# Altium PCB PCB1.PcbDoc
Units mil, origin at the board's own origin, x right, y up, seen from the top; angles counter-clockwise.
Board outline 6000 x 4000 mil, 2 copper layers (Top Layer, Bottom Layer); 164 components, 109 nets, 675 pads, 2 vias.
Unrouted connection lines stored in the file: 443.
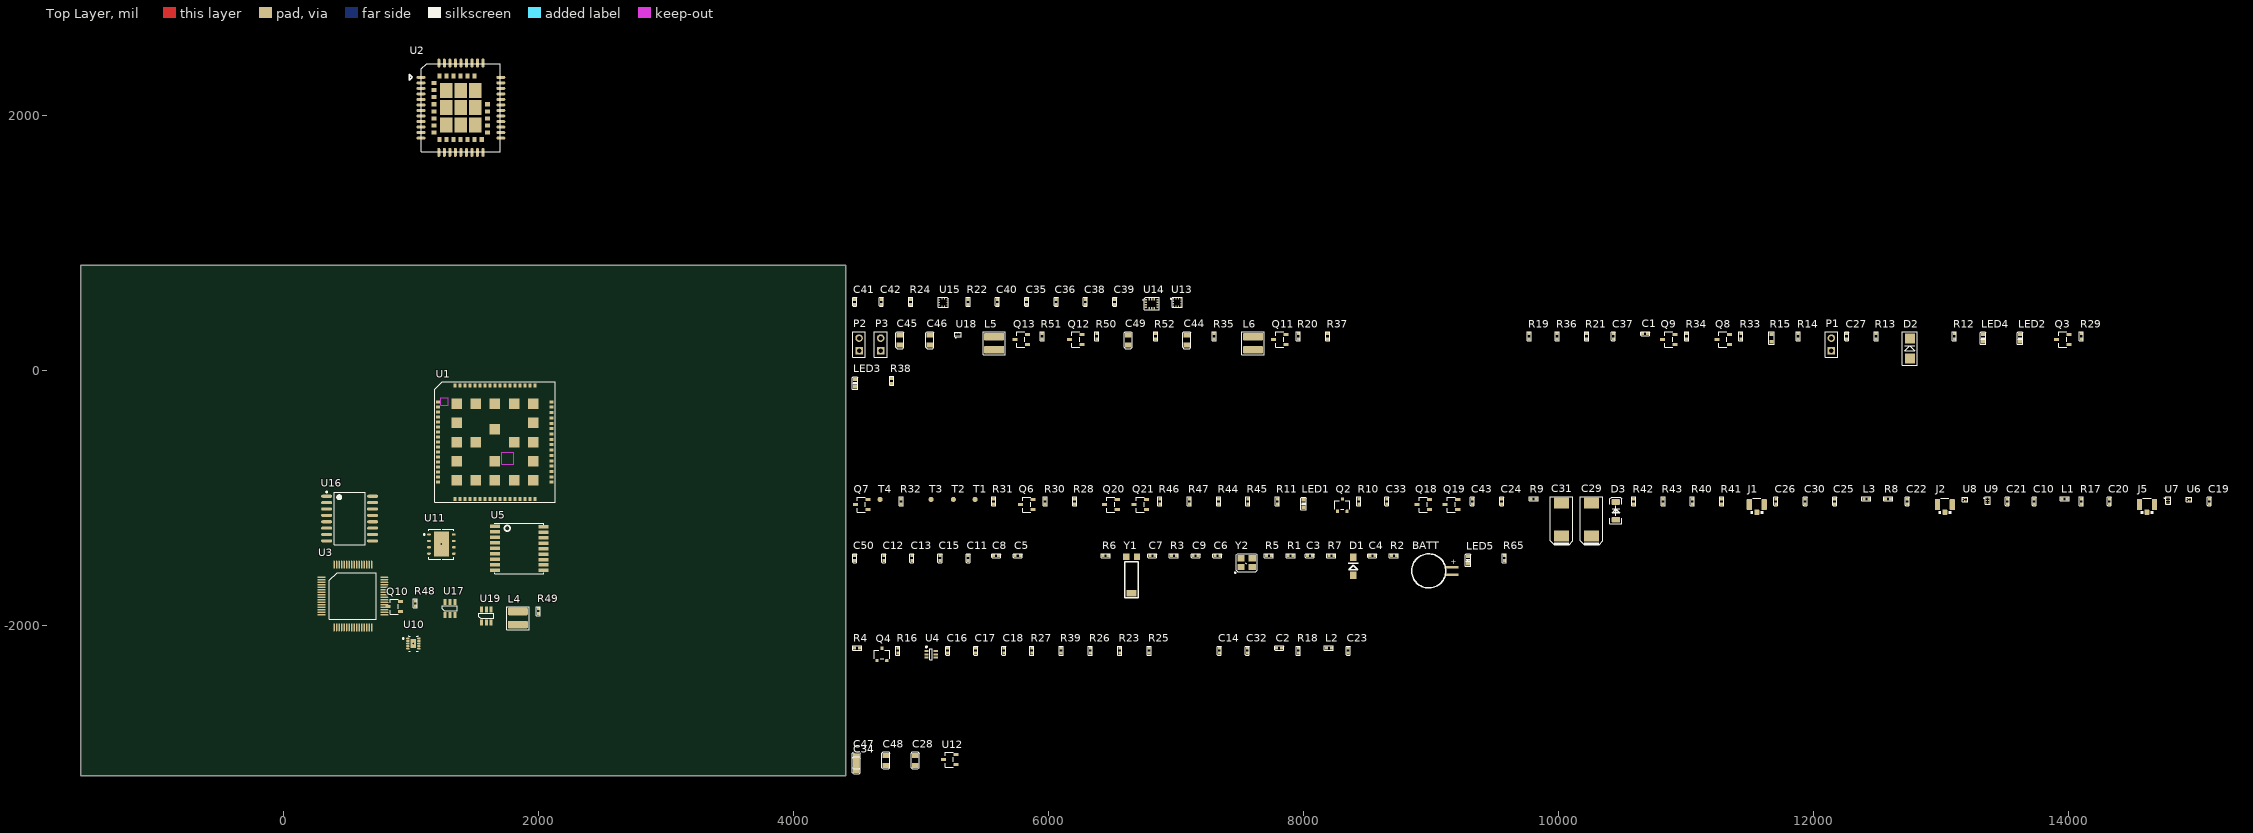
[diagram p0: Top Layer view]
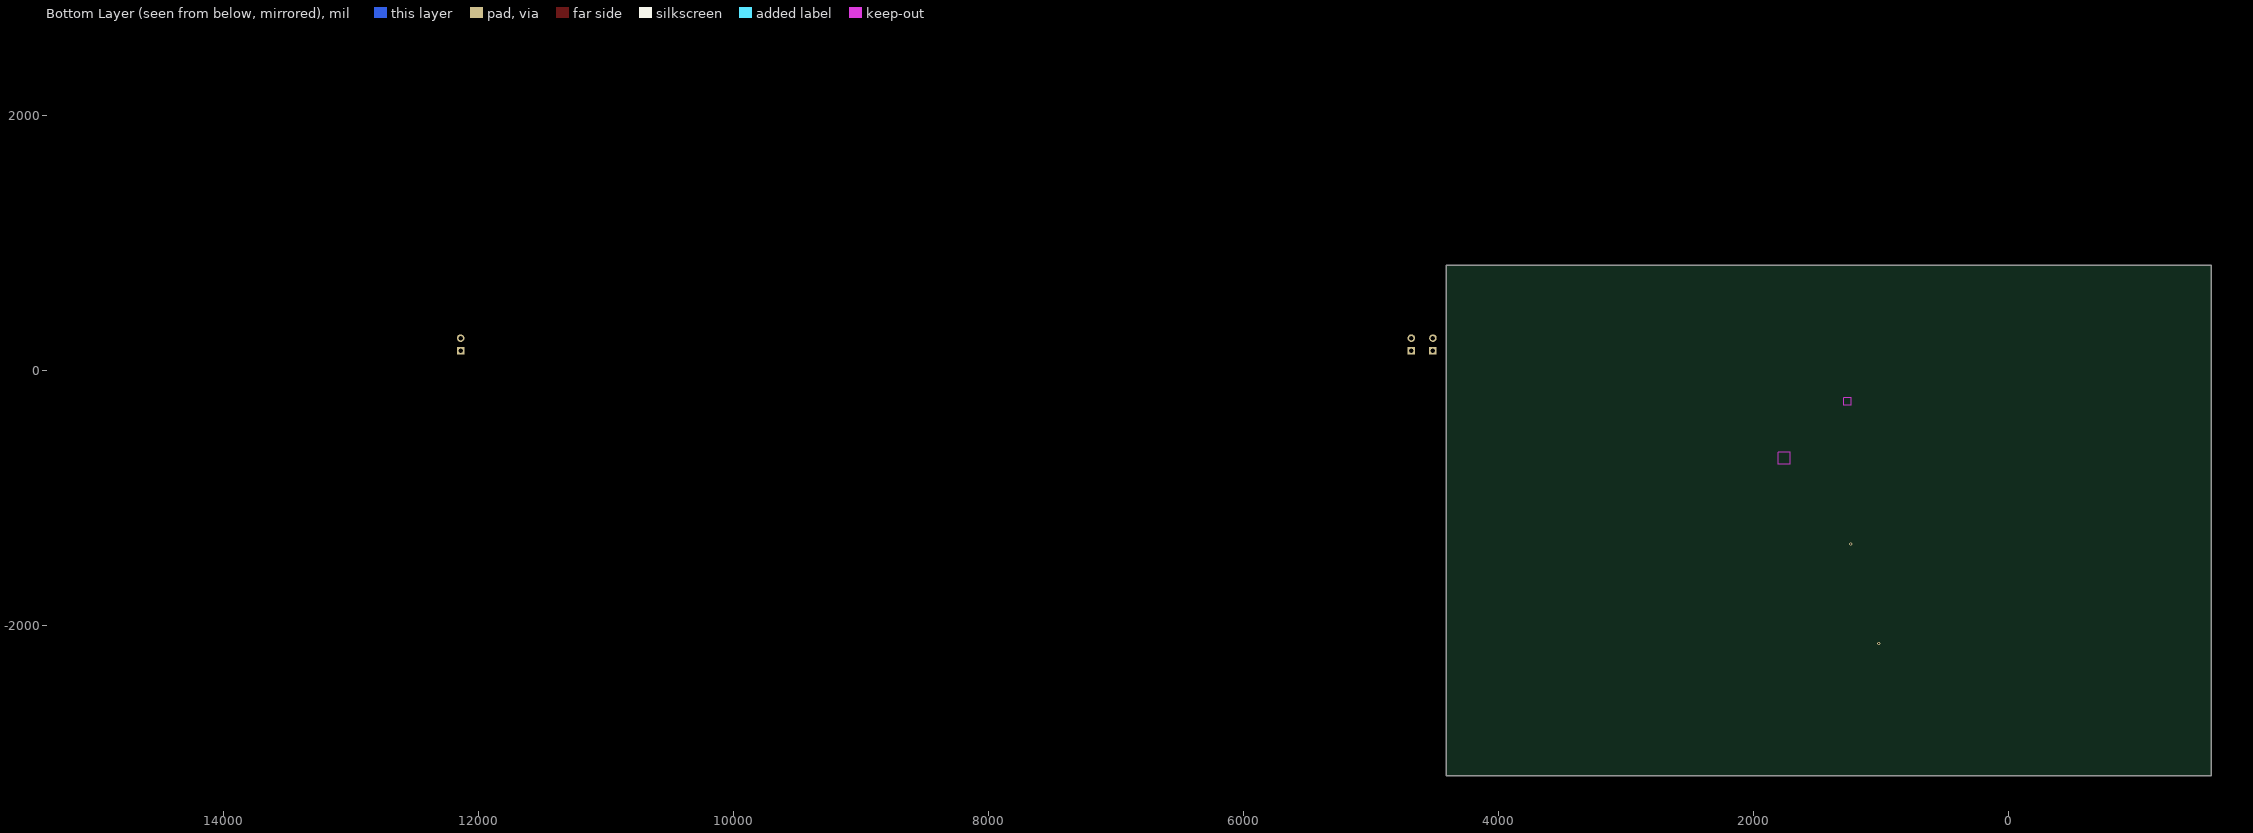
[diagram p1: Bottom Layer view, seen from below]

## Layer stack, top to bottom
Top Layer: signal copper 1.4
Dielectric: dielectric 12.6, FR-4, Dk 4.8
Bottom Layer: signal copper 1.4

## Board outline
-1590,-3175 4410,-3175 4410,825 -1590,825

## Design rules (kind name [scope] priority, off if disabled: settings)
Clearance [All] p1: gap=10
PolygonConnect [All] p1: connectstyle=Relief reliefconductorwidth=10 reliefentries=4 polygonreliefangle="90 Angle"
RoutingVias [All] p1: holewidth=28 width=50 viastyle="Through Hole" minholewidth=28 minwidth=50 maxholewidth=28 maxwidth=50
SilkscreenOverComponentPads [All] p1: minsilkscreentomaskgap=10
SolderMaskExpansion [All] p1: expansion=4
Width [All] p1: maxlimit=10 minlimit=10 preferedwidth=10
27 further rules are at their usual default settings.

## Classes and differential pairs
component class sensors: C35 C36 C38 C39 C40 C41 C42 R22 R24 U13 U14 U15
component class power: C1 C27 C28 C34 C37 C44 C45 C46 C47 C48 C49 D2 L4 L5 L6 LED2 LED4 P1 P2 P3 Q3 Q8 Q9 Q10 Q11 Q12 Q13 R12 R13 R14 R15 R19 R20 R21 R29 R33 R34 R35 R36 R37 R48 R49 R50 R51 R52 U10 U12 U17 U18 U19
component class GPS&&lte: C10 C19 C20 C21 C22 C24 C25 C26 C29 C30 C31 C33 C43 D3 J1 J2 J5 L1 L3 LED1 Q2 Q6 Q7 Q18 Q19 Q20 Q21 R8 R9 R10 R11 R17 R28 R30 R31 R32 R40 R41 R42 R43 R44 R45 R46 R47 T1 T2 T3 T4 U6 U7 U8 U9
component class NBIOT: LED3 R38 SIM1 U2
component class CPU: BATT C3 C4 C5 C6 C7 C8 C9 C11 C12 C13 C15 C50 D1 LED5 R1 R2 R3 R5 R6 R7 R65 U3 U16 U? Y1 Y2
component class 4G: C2 C14 C16 C17 C18 C23 C32 L2 Q4 R4 R16 R18 R23 R25 R26 R27 R39 U1 U4 U5 U11 U?

## Components (designator, comment, footprint, x,y, rotation, side; value= is the part's Value field where it differs from the comment)
BATT "MS621FE" MS621FE 9165,-1570 r0 top
C1 "0.1uF/25V" 0402c 10660,290 r0 top
C2 "4.7uF/10V" 0402c 7790,-2175 r0 top
C3 "0.1uF/25v" 0402c 8030,-1450 r0 top
C4 "22pF" 0402c 8520,-1450 r0 top
C5 "6pF" 0402c 5740,-1450 r0 top
C6 "22pF" 0402c 7305,-1450 r0 top
C7 "6pF" 0402c 6795,-1450 r0 top
C8 "0.1uF/25V" 0402C 5570,-1450 r0 top
C9 "0.1uF/25V" 0402C 7135,-1450 r0 top
C10 "NC" 0402c 13730,-1045 r90 top
C11 "0.1uF/25V" 0402C 5370,-1490 r90 top
C12 "0.1uF/25V" 0402C 4710,-1490 r90 top
C13 "0.1uF/25V" 0402C 4930,-1490 r90 top
C14 "0.1uF" 0402C 7340,-2215 r90 top
C15 "0.1uF/25V" 0402C 5150,-1490 r90 top
C16 "10pF/NC" 0402C 5210,-2215 r90 top
C17 "10pF/NC" 0402C 5430,-2215 r90 top
C18 "10pF/NC" 0402C 5650,-2215 r90 top
C19 "0.1uF" 0402C 15105,-1045 r90 top
C20 "36pF" 0402c 14320,-1045 r90 top
C21 "NC" 0402c 13520,-1045 r90 top
C22 "36pF" 0402c 12735,-1045 r90 top
C23 "4.7uF" 0402c 8350,-2215 r90 top
C24 "10pF" 0402C 9555,-1045 r90 top
C25 "0.1uF" 0402C 12165,-1045 r90 top
C26 "NC" 0402c 11705,-1045 r90 top
C27 "1uF/25V" 0402C 12260,250 r90 top
C28 "22uF/10V" 0805C 4955,-3095 r90 top
C29 "1000uF" 7343 10260,-1295 r90 top
C30 "NC" 0402c 11935,-1045 r90 top
C31 "1000uF" 7343 10025,-1295 r90 top
C32 "10uF/10V" 0402C 7560,-2215 r90 top
C33 "0.1uF" 0402C 8655,-1045 r90 top
C34 "22uF/10V" 0805C 4495,-3135 r90 top
C35 "0.1uF/25V" 0402C 5830,520 r90 top
C36 "0.1uF/25V" 0402C 6060,520 r90 top
C37 "0.1uF/25V" 0402c 10430,250 r90 top
C38 "0.1uF/25V" 0402C 6290,520 r90 top
C39 "0.1uF/25V" 0402C 6520,520 r90 top
C40 "22pF" 0402c 5600,520 r90 top
C41 "0.1uF/25V" 0402C 4480,520 r90 top
C42 "0.1uF/25V" 0402C 4690,520 r90 top
C43 "33pF" 0402C 9325,-1045 r90 top
C44 "22uF/10V" 0805C 7085,200 r90 top
C45 "22uF/10V" 0805C 4835,200 r90 top
C46 "22uF/10V" 0805C 5070,200 r90 top
C47 "22uF/10V" 0805C 4495,-3095 r90 top
C48 "22uF/10V" 0805C 4725,-3095 r90 top
C49 "22uF/10V" 0805C 6625,200 r90 top
C50 "0.1uF/25V" 0402C 4480,-1490 r90 top
D1 "1N4148" DIODE_SOP 8390,-1605 r90 top
D2 "SMAJ12CA" SMA 12755,95 r90 top
D3 "DIODE_SCHOTTKY_0" LL-34(D1206) 10450,-1100 r90 top
J1 "IPEX" RF-UFL 11555,-1050 r0 top
J2 "IPEX" RF-UFL 13030,-1050 r0 top
J5 "IPEX" RF-UFL 14615,-1050 r0 top
L1 "LQW15A" 0402R 13950,-1005 r0 top
L2 "27nH" 0402R 8180,-2175 r0 top
L3 "LQW15A" 0402R 12395,-1005 r0 top
L4 "SRP4020TA-1R0M" CD_4*4 1840,-1940 r0 top
L5 "SRP4020TA-2R2M" CD_4*4 5575,215 r0 top
L6 "SRP4020TA-1R0M" CD_4*4 7605,215 r0 top
LED1 "LED" 0603LED 8000,-1070 r90 top
LED2 "LED" 0603LED 13620,225 r90 top
LED3 "LED" 0603LED 4485,-125 r90 top
LED4 "LED" 0603LED 13330,225 r90 top
LED5 "LED" 0603LED 9290,-1515 r90 top
P1 "Header 2" HDR1X2 12140,155 r90 top
P2 "Header 2" HDR1X2 4515,155 r90 top
P3 "Header 2" HDR1X2 4685,155 r90 top
Q2 "S8050" SOT23 8305,-1055 r0 top
Q3 "Si2369DS" sot23-3 14005,205 r0 top
Q4 "S8050" SOT23 4695,-2225 r0 top
Q6 "MMBT3904" SOT23-3 5880,-1090 r0 top
Q7 "MMBT3904" SOT23-3 4585,-1090 r0 top
Q8 "Si2369DS" sot23-3 11340,205 r0 top
Q9 "S8050" SOT23-3 10915,205 r0 top
Q10 "Si2369DS" sot23-3 920,-1890 r0 top
Q11 "S8050" SOT23-3 7865,205 r0 top
Q12 "Si2369DS" sot23-3 6265,205 r0 top
Q13 "S8050" SOT23-3 5835,205 r0 top
Q18 "MMBT3904" SOT23-3 8990,-1090 r0 top
Q19 "MMBT3904" SOT23-3 9210,-1090 r0 top
Q20 "MMBT3904" SOT23-3 6540,-1090 r0 top
Q21 "MMBT3904" SOT23-3 6770,-1090 r0 top
R1 "1MR" 0402R 7880,-1450 r0 top
R2 "10K/1%" 0402R 8690,-1450 r0 top
R3 "100K" 0402R 6965,-1450 r0 top
R4 "47K" 0402R 4480,-2175 r0 top
R5 "10K/1%" 0402R 7710,-1450 r0 top
R6 "10K" 0402R 6430,-1450 r0 top
R7 "470" 0402R 8200,-1450 r0 top
R8 "0" 0402R 12565,-1005 r0 top
R9 "1K" 0402R 9785,-1005 r0 top
R10 "4.7K" 0402R 8435,-1045 r90 top
R11 "47K" 0402R 7795,-1045 r90 top
R12 "1K/1%" 0402R 13105,250 r90 top
R13 "3.95K/1%" 0402R 12490,250 r90 top
R14 "21.5k/1%" 0402R 11880,250 r90 top
R15 "RTH103AT" 0603R 11670,225 r90 top
R16 "4.7K" 0402R 4820,-2215 r90 top
R17 "0" 0402R 14100,-1045 r90 top
R18 "10K" 0402R 7960,-2215 r90 top
R19 "400K/1%" 0402R 9770,250 r90 top
R20 "100K/1%" 0402R 7960,250 r90 top
R21 "400K/1%" 0402R 10220,250 r90 top
R22 "4.7K" 0402R 5370,520 r90 top
R23 "10R" 0402R 6560,-2215 r90 top
R24 "4.7K" 0402R 4920,520 r90 top
R25 "0R" 0402R 6790,-2215 r90 top
R26 "0R" 0402R 6330,-2215 r90 top
R27 "10R" 0402R 5870,-2215 r90 top
R28 "4.7K" 0402R 6205,-1045 r90 top
R29 "1K/1%" 0402R 14100,250 r90 top
R30 "10K" 0402R 5975,-1045 r90 top
R31 "4.7K" 0402R 5570,-1045 r90 top
R32 "4.7K" 0402R 4845,-1045 r90 top
R33 "4K7" 0402R 11430,250 r90 top
R34 "4K7" 0402R 11005,250 r90 top
R35 "10K/1%" 0402R 7300,250 r90 top
R36 "4K7" 0402R 9990,250 r90 top
R37 "4K7" 0402R 8190,250 r90 top
R38 "1K" 0402R 4770,-100 r90 top
R39 "10R" 0402R 6100,-2215 r90 top
R40 "4.7K" 0402R 11050,-1045 r90 top
R41 "4.7K" 0402R 11280,-1045 r90 top
R42 "10K" 0402R 10590,-1045 r90 top
R43 "10K" 0402R 10820,-1045 r90 top
R44 "4.7K" 0402R 7335,-1045 r90 top
R45 "4.7K" 0402R 7565,-1045 r90 top
R46 "4.7K" 0402R 6875,-1045 r90 top
R47 "4.7K" 0402R 7105,-1045 r90 top
R48 "100K/1%" 0402R 1035,-1845 r90 top
R49 "54K/1%" 0402R 2000,-1905 r90 top
R50 "4K7" 0402R 6380,250 r90 top
R51 "4K7" 0402R 5950,250 r90 top
R52 "10K/1%" 0402R 6840,250 r90 top
R65 "1K" 0402R 9575,-1490 r90 top
T1 "TPD" TPD 5425,-1010 r0 top
T2 "TPD" TPD 5255,-1010 r0 top
T3 "TPD" TPD 5080,-1010 r0 top
T4 "TPD" TPD 4680,-1010 r0 top
U1 "A7670" A7670 1660,-560 r0 top
U2 "SIM7080G" SIM868 1080,2300 r0 top
U3 "stm32l412r8t6" LQFP-64 300,-1620 r0 top
U4 "SMF05C_1" SC70-6L 5080,-2225 r0 top
U5 "SIM868E/SIM68" SIM68MB 1660,-1220 r0 top
U6 "SAFFB1G56KB0F0A" SAFFB1G56KB0F0A 14925,-1010 r0 top
U7 "AW5005DNR" AW5005 14780,-1020 r0 top
U8 "SAFFB1G56KB0F0A" SAFFB1G56KB0F0A 13170,-1010 r0 top
U9 "AW5005DNR" AW5005 13365,-1020 r0 top
U10 "bq24210" QFN50P200X300X80-10N 1020,-2140 r0 top
U11 "SLI76CF3600P" QFN127P500X600X80-8N 1240,-1360 r0 top
U12 "REF3025AIDBZR" SOT23-3 5275,-3090 r0 top
U13 "LIS2MDL" LIS2MDL 7010,535 r0 top
U14 "LSM6DS3TR" LSM6DS3TR-C 6810,525 r0 top
U15 "BMP388" BMP388 5175,535 r0 top
U16 "MX25L51245GMI-10G" SOP127P1030X239-16N 520,-1160 r0 top
U17 "TPS61023" SOT23-6 1270,-1915 r0 top
U18 "TPS610997YFFR" TPS610997YFFR 5290,285 r90 top
U19 "TPS61023" SOT23-6 1555,-1975 r0 top
Y1 "MC-146 32.768K/6pF" 32.768K 6610,-1460 r0 top
Y2 "8MHz" OSCILLATOR-3.2X2.5 7555,-1505 r0 top

## Footprints (in the part's own frame and the unit in brackets; to place one, negate y for a bottom-side part, rotate by r counter-clockwise, add the part's x,y. Pads: shape width x height; smd on the part's side, far side on the other; paste and mask are expansions set on the pad)
32.768K [mil]
  rect 50x50 smd: 1(0,0) 2(85,0)
  rect 78.74x50 smd: 3(42.13,-285)
  silkscreen extent -10,-320 95,-40
0402c [mm]
  rect 0.6x0.6 smd: 1(0,0) 2(1,0)
  silkscreen extent -0.4,-0.4 1.4,0.4
0402C [mm]
  rect 0.6x0.6 smd: 1(0,0) 2(1,0)
  silkscreen extent -0.4,-0.4 1.4,0.4
0402R [mm]
  rect 0.6x0.6 smd: 1(0,0) 2(1,0)
  silkscreen extent -0.4,-0.4 1.4,0.4
0603LED [mm]
  rect 0.7x0.85 smd: 1(0,0) 2(1.5,0)
  silkscreen extent -0.5,-0.55 2,0.55
0603R [mm]
  rect 0.7x0.85 smd: 1(0,0) 2(1.5,0)
  silkscreen extent -0.5,-0.55 2,0.55
0805C [mm]
  rect 1x1.3 smd: 1(0,0) 2(2,0)
  silkscreen extent -0.7,-0.8 2.7,0.8
7343 [mm]
  rect 2.2x3 smd: 1(0,0) 2(6.5,0)
  silkscreen extent -1.75,-2.25 7.8,2.25
A7670 [mm]
  rect 0.8x0.6 smd: 1(-11.3,8) 2(-11.3,7) 3(-11.3,6) 4(-11.3,5) 5(-11.3,4) 6(-11.3,3) 7(-11.3,2) 8(-11.3,1) 9(-11.3,0) 10(-11.3,-1) 11(-11.3,-2) 12(-11.3,-3) 13(-11.3,-4) 14(-11.3,-5) 15(-11.3,-6) 16(-11.3,-7) 17(-11.3,-8) 35(11.3,-8) 36(11.3,-8) 37(11.3,-6.933) 38(11.3,-5.867) 39(11.3,-4.8) 40(11.3,-3.733) 41(11.3,-2.667) 42(11.3,-1.6) 43(11.3,-0.533) 44(11.3,0.533) 45(11.3,1.6) 46(11.3,2.667) 47(11.3,3.733) 48(11.3,4.8) 49(11.3,5.867) 50(11.3,6.933) 51(11.3,8)
  rect 0.6x0.8 smd: 18(-8,-11.3) 19(-7,-11.3) 20(-6,-11.3) 21(-5,-11.3) 22(-4,-11.3) 23(-3,-11.3) 24(-2,-11.3) 25(-1,-11.3) 26(0,-11.3) 27(1,-11.3) 28(2,-11.3) 29(3,-11.3) 30(4,-11.3) 31(5,-11.3) 32(6,-11.3) 33(7,-11.3) 34(8,-11.3) 52(8,11.3) 53(7,11.3) 54(6,11.3) 55(5,11.3) 56(4,11.3) 57(3,11.3) 58(2,11.3) 59(1,11.3) 60(0,11.3) 61(-1,11.3) 62(-2,11.3) 63(-3,11.3) 64(-4,11.3) 65(-5,11.3) 66(-6,11.3) 67(-7,11.3) 68(-8,11.3)
  rect 2.1x2.1 smd: 69(-7.6,7.6) 70(-7.6,3.8) 71(-7.6,0) 72(-7.6,-3.8) 73(-7.6,-7.6) 74(-3.8,-7.6) 75(0,-7.6) 76(3.8,-7.6) 77(7.6,-7.6) 78(7.6,-3.8) 79(7.6,0) 80(7.6,3.8) 81(7.6,7.6) 82(3.8,7.6) 83(0,7.6) 84(-3.8,7.6) 85(-3.8,0) 86(0,-3.8) 87(3.8,0) 88(0,2.591)
  Keep-Out Layer lines w0.127: 1.321,-2.07 1.321,-4.47 3.721,-4.47 3.721,-2.07 ; 1.321,-2.045 3.721,-2.045 ; -10.77,7.314 -9.27,7.314 -9.27,8.814 -10.77,8.814 -10.77,7.314
  silkscreen extent -12,-12 12,12
AW5005 [mm]
  rect 0.35x0.2 smd: 1(-0.25,0.5) 2(-0.25,0) 3(-0.25,-0.5) 4(0.25,-0.5) 5(0.25,0) 6(0.25,0.5)
  silkscreen extent -0.77,-0.75 0.5,0.75
BMP388 [mm]
  rect 0.25x0.275 smd: 1(0.25,0.763) 2(-0.25,0.763) 6(-0.25,-0.763) 7(0.25,-0.763)
  rect 0.275x0.25 smd: 3(-0.763,0.5) 4(-0.763,0) 5(-0.763,-0.5) 8(0.763,-0.5) 9(0.763,0) 10(0.763,0.483)
  silkscreen extent -1,-1 1,1
CD_4*4 [mm]
  rrect30% 4x1.5 smd: 1(0,-1.3) 2(0,1.3)
  silkscreen extent -2.23,-2.3 2.22,2.28, body extent -2,-2 2,2, height 1
DIODE_SOP [mm]
  rect 1.5x1.3 smd: 1(0,0) 2(3.556,0)
  silkscreen extent 1.14,-1.02 2.56,1.02
HDR1X2 [mm] "Connector; Header; 2 Position"
  rect 1.5x1.5 hole 0.9: 1(0,0)
  round 1.5 hole 0.9: 2(2.54,0)
  silkscreen extent -1.27,-1.27 3.81,1.27
LIS2MDL [mm]
  rect 0.275x0.25 smd: 1(-0.763,0.75) 2(-0.763,0.25) 3(-0.763,-0.25) 4(-0.763,-0.75) 7(0.763,-0.75) 8(0.763,-0.25) 9(0.763,0.25) 10(0.763,0.75)
  rect 0.25x0.275 smd: 5(-0.25,-0.763) 6(0.25,-0.763) 11(0.25,0.763) 12(-0.25,0.763)
  silkscreen extent -1.35,-1 1,1
LL-34(D1206) [mil]
  rrect25% 45x65 smd: 1(-70,0) 2(70,0)
  silkscreen extent -102,-47 108,47, body extent -70,-28 68,30, height 56
LQFP-64 [mm]
  rect 1.6x0.3 smd: 1(0,0)
  oval 1.6x0.3 smd: 2(0,-0.5) 3(0,-1) 4(0,-1.5) 5(0,-2) 6(0,-2.5) 7(0,-3) 8(0,-3.5) 9(0,-4) 10(0,-4.5) 11(0,-5) 12(0,-5.5) 13(0,-6) 14(0,-6.5) 15(0,-7) 16(0,-7.5) 33(12.5,-7.5) 34(12.5,-7) 35(12.5,-6.5) 36(12.5,-6) 37(12.5,-5.5) 38(12.5,-5) 39(12.5,-4.5) 40(12.5,-4) 41(12.5,-3.5) 42(12.5,-3) 43(12.5,-2.5) 44(12.5,-2) 45(12.5,-1.5) 46(12.5,-1) 47(12.5,-0.5) 48(12.5,0)
  oval 0.3x1.6 smd: 17(2.5,-10) 18(3,-10) 19(3.5,-10) 20(4,-10) 21(4.5,-10) 22(5,-10) 23(5.5,-10) 24(6,-10) 25(6.5,-10) 26(7,-10) 27(7.5,-10) 28(8,-10) 29(8.5,-10) 30(9,-10) 31(9.5,-10) 32(10,-10) 49(10,2.5) 50(9.5,2.5) 51(9,2.5) 52(8.5,2.5) 53(8,2.5) 54(7.5,2.5) 55(7,2.5) 56(6.5,2.5) 57(6,2.5) 58(5.5,2.5) 59(5,2.5) 60(4.5,2.5) 61(4,2.5) 62(3.5,2.5) 63(3,2.5) 64(2.5,2.5)
  silkscreen extent 1.59,-8.41 10.91,0.91
LSM6DS3TR-C [mm]
  rect 0.48x0.3 smd: 1(-1.15,0.75) 2(-1.15,0.25) 3(-1.15,-0.25) 4(-1.15,-0.75) 8(1.15,-0.75) 9(1.15,-0.25) 10(1.15,0.25) 11(1.15,0.75)
  rect 0.3x0.48 smd: 5(-0.5,-0.91) 6(0,-0.91) 7(0.5,-0.91) 12(0.5,0.91) 13(0,0.91) 14(-0.5,0.91)
  silkscreen extent -1.83,-1.25 1.5,1.25
MS621FE [mm]
  rect 2.5x0.5 smd: 1(0,-0.749) 2(0,0.749)
  silkscreen extent -8.04,-3.41 -1.25,3.39
OSCILLATOR-3.2X2.5 [mil] "OSCILLATOR-3.2X2.5"
  rect 56x48 smd: 1(-43.31,-33.46) 2(44,-33.46) 3(44,34) 4(-43.31,34)
  silkscreen extent -95,-83 83,71
QFN50P200X300X80-10N [mm] "QFN, 10-Leads, Body 2.9x1.9mm (max), Pitch 0.50mm, IPC Medium Density"
  oval 0.7x0.35 smd: 1(-1.1,1) 2(-1.1,0.5) 3(-1.1,0) 4(-1.1,-0.5) 5(-1.1,-1) 6(1.1,-1) 7(1.1,-0.5) 8(1.1,0) 9(1.1,0.5) 10(1.1,1)
  rect 1.1x1.8 smd: 11(0,0)
  silkscreen extent -2.12,-1.58 0.95,1.57, body extent -0.95,-1.45 0.95,1.45, height 0.8
QFN127P500X600X80-8N [mm] "QFN, 8-Leads, Body 6.0x5.0mm (max), Pitch 1.27mm, IPC Medium Density"
  oval 0.75x0.45 smd: 1(-2.475,1.905) 2(-2.475,0.635) 3(-2.475,-0.635) 4(-2.475,-1.905) 5(2.475,-1.905) 6(2.475,-0.635) 7(2.475,0.635) 8(2.475,1.905)
  rect 3x5 smd: 9(0,0)
  silkscreen extent -3.52,-3 2.5,3
RF-UFL [mm]
  rrect30% 1x1.05 smd: 1(0,-1.525)
  rrect30% 1.05x2.2 smd: 2(-1.475,0) 2(1.475,0)
  silkscreen extent -1.3,-1.93 1.3,1.3, body extent -1.7,-1.55 1.7,1.55, height 1.25
SAFFB1G56KB0F0A [mm]
  rect 0.3x0.3 smd: 1(0,0)
  rect 0.25x0.35 smd: 2(0.425,-0.288) 5(0.425,0.288)
  rect 0.3x0.35 smd: 3(0.9,-0.288) 4(0.9,0.288)
  silkscreen extent -0.1,-0.44 1,0.46
SC70-6L [mm]
  rect 0.85x0.4 smd: 1(-0.925,0.65) 2(-0.925,0) 3(-0.925,-0.65) 4(0.925,-0.65) 5(0.925,0) 6(0.925,0.65)
  silkscreen extent -1.09,-1.1 0.25,1.65
SIM68MB [mm]
  rect 2x0.7 smd: 1(0,0) 2(0,-1.1) 3(0,-2.2) 4(0,-3.3) 5(0,-4.4) 6(0,-5.5) 7(0,-6.6) 8(0,-7.7) 9(0,-8.8) 10(9.7,-8.8) 11(9.7,-7.719) 12(9.7,-6.638) 13(9.7,-5.557) 14(9.7,-4.476) 15(9.7,-3.395) 16(9.7,-2.314) 17(9.7,-1.233) 18(9.7,-0.152)
  silkscreen extent 0,-9.47 9.7,0.63
SIM868 [mm]
  oval 1.8x0.6 smd: 1(0,0) 2(0,-1.1) 3(0,-2.2) 4(0,-3.3) 5(0,-4.4) 6(0,-5.5) 7(0,-6.6) 8(0,-7.7) 9(0,-8.8) 10(0,-9.9) 11(0,-11) 12(0,-12.1) 22(15.9,-12.1) 23(15.9,-11) 24(15.9,-9.9) 25(15.9,-8.8) 26(15.9,-7.7) 27(15.9,-6.6) 28(15.9,-5.5) 29(15.9,-4.4) 30(15.9,-3.3) 31(15.9,-2.2) 32(15.9,-1.1) 33(15.9,0)
  oval 0.6x1.8 smd: 13(3.55,-14.95) 14(4.65,-14.95) 15(5.75,-14.95) 16(6.85,-14.95) 17(7.95,-14.95) 18(9.05,-14.95) 19(10.15,-14.95) 20(11.25,-14.95) 21(12.35,-14.95) 34(12.35,2.85) 35(11.25,2.85) 36(10.15,2.85) 37(9.05,2.85) 38(7.95,2.85) 39(6.85,2.85) 40(5.75,2.85) 41(4.65,2.85) 42(3.55,2.85)
  rect 1x0.8 smd: 43(2.549,-1.159) 44(2.549,-2.559) 45(2.549,-3.959) 46(2.549,-5.359) 47(2.549,-6.759) 48(2.549,-8.159) 49(2.549,-9.559) 50(2.549,-10.959) 58(13.251,-10.959) 59(13.251,-9.559) 60(13.251,-8.159) 61(13.251,-6.759) 62(13.251,-5.359)
  rect 0.8x1 smd: 51(3.7,-12.359) 52(5.1,-12.359) 53(6.5,-12.359) 54(7.9,-12.359) 55(9.3,-12.359) 56(10.7,-12.359) 57(12.1,-12.359) 63(10.7,0.25) 64(9.3,0.25) 65(7.9,0.25) 66(6.5,0.25) 67(5.1,0.25) 68(3.7,0.25)
  rect 2.5x3 smd: 69(5,-2.65) 70(5,-6.05) 71(5,-9.45) 72(7.9,-9.45) 73(10.8,-9.45) 74(10.8,-6.05) 75(10.8,-2.65) 76(7.9,-2.65) 77(7.9,-6.05)
  silkscreen extent -2.35,-14.85 15.8,2.75
SMA [mm]
  rect 2x2 smd: 1(0,0) 2(4,0)
  silkscreen extent -1.3,-1.5 5.3,1.5
SOP127P1030X239-16N [mm] "SOP, 16-Leads, Body 10.5x7.6mm (max), Pitch 1.27mm, IPC Medium Density"
  oval 2.2x0.6 smd: 1(-4.575,4.445) 2(-4.575,3.175) 3(-4.575,1.905) 4(-4.575,0.635) 5(-4.575,-0.635) 6(-4.575,-1.905) 7(-4.575,-3.175) 8(-4.575,-4.445) 9(4.575,-4.445) 10(4.575,-3.175) 11(4.575,-1.905) 12(4.575,-0.635) 13(4.575,0.635) 14(4.575,1.905) 15(4.575,3.175) 16(4.575,4.445)
  silkscreen extent -4.7,-5.25 3.08,5.42, body extent -3.8,-5.25 3.8,5.25, height 2.39
SOT23 [mm]
  rrect30% 0.6x0.65 smd: 1(-0.95,-1.225) 2(0.95,-1.225) 3(0,1.225)
  silkscreen extent -1.5,-0.85 1.5,0.85, body extent -1.45,-1.4 1.45,1.4, height 1.2
sot23-3 [mm]
  rect 1x0.6 smd: 1(0,0) 2(0,2) 3(-2.5,1)
  silkscreen extent -2.1,-0.5 -0.5,2.5
SOT23-3 [mm]
  rect 1x0.6 smd: 1(0,0) 2(0,2) 3(-2.5,1)
  silkscreen extent -2.1,-0.5 -0.5,2.5
SOT23-6 [mm]
  rect 0.6x1.2 smd: 1(0,0) 2(0.95,0) 3(1.9,0) 4(1.9,2.6) 5(0.95,2.6) 6(0,2.6)
  silkscreen extent -0.56,0.81 2.44,1.8
TPD [mm]
  round 1 smd: 1(0,0)
TPS610997YFFR [mm]
  round 0.2 smd: A1(-0.2,0.4) A2(0.2,0.4) B1(-0.2,0) B2(0.2,0) C1(-0.2,-0.4) C2(0.2,-0.4)
  silkscreen extent -0.77,-0.63 0.46,0.63

## Part data
BATT: library part SBatery
C1 C2 C10 C20 C21 C22 C23 C26 C30 C37: library part Cap, "Capacitor"
C3 C4 C5 C6 C7 C8 C9 C11 C12 C13 C14 C15 C16 C17 C18 C19 C24 C25 C27 C28 C32 C33 C34 C35 C36 C38 C39 C40 C41 C42 C43 C44 C45 C46 C47 C48 C49 C50: library part CAP, "Capacitor"
C29 C31: library part "Cap Pol3", "Polarized Capacitor (Surface Mount)"
D1: library part D
D2: library part DIODE_SCHOTTKY_0
J1 J2 J5: library part ANT
L1 L2 L3 L4 L5 L6: library part INDUCTOR_1
P1 P2 P3: "Header, 2-Pin"
Q2 Q4 Q9 Q11 Q13: library part 2N1069_1
Q3 Q8 Q10 Q12: library part NCE4060K, "NMOSFET"
Q6 Q7 Q18 Q19 Q20 Q21: library part NPN
R1: library part Res3, "Resistor"
R2 R4 R5 R9 R10 R11 R12 R13 R14 R15 R16 R18 R19 R20 R21 R22 R23 R24 R25 R26 R27 R28 R29 R30 R31 R32 R33 R34 R35 R36 R37 R38 R39 R40 R41 R42 R43 R44 R45 R46 R47 R48 R49 R50 R51 R52 R65: library part RES1
R3 R6 R7 R8 R17: library part Res2, "Resistor"
U2: library part SIM868E/SIM868
U3: library part STM32L100R8T6, "ARM Cortex-M3 32-bit MCU, 64 KB Flash, 8 KB Internal RAM, 51 I/Os, 64-pin LQFP, -40 to 85 degC, Tray"
U4: "TVS"
U5: library part SIM68MB
U6 U8: library part SAFFB1G56KBOFA
U10: library part bq2410
U12: library part REF3012
Y1 Y2: library part XTAL, "Crystal Oscillator"

## Via types
v1: diameter 25.98, hole 12.99, Top Layer to Bottom Layer, tented top, 2 vias

## Nets (pads, with @x,y where several pads share a name; then routed paths per layer and width w, separated by ;. In a path a pad name is that pad's centre, name@x,y a point inside that pad or via, vN(x,y) a via of type N, cw(c..) or ccw(c..) an arc to the next point about the centre after c; other vN are vias at no path point)
2.5V: C1.1 C9.2 U3.13 U12.2
AGND: BATT.1 C1.2 C2.1 C3.2 C4.1 C5.2 C6.1 C7.2 C8.1 C9.1 C10.2 C11.1 C12.1 C13.1 C14.1 C15.1 C16.1 C17.1 C18.1 C19.1 C21.2 C23.1 C24.1 C25.1 C26.2 C27.2 C28.2 C29.2 C30.2 C31.2 C32.1 C33.1 C34.2 C35.1 C36.1 C37.2 C38.1 C39.1 C40.2 C41.1 C42.1 C43.1 C44.2 C45.2 C46.2 C47.2 C48.2 C49.2 C50.1 D2.1 D3.1 J1.2 J2.2 J5.2 P1.1 P2.1 P3.1 Q2.2 Q3.1 Q4.2 Q9.2 Q11.2 Q13.2 R3.2 R4.2 R5.2 R9.2 R11.2 R13.2 R15.1 R20.1 R35.1 R38.2 R48.1 R52.1 T4.1 U1.2 U1.17 U1.18 U1.29 U1.39 U1.45 U1.46 U1.54 U1.58 U1.59 U1.61 U1.62 U1.63 U1.64 U1.65 U1.69 U1.70 U1.71 U1.72 U1.73 U1.74 U1.75 U1.76 U1.77 U1.78 U1.79 U1.80 U1.81 U1.82 U1.83 U1.84 U1.85 U1.86 U1.87 U1.88 U2.8 U2.13 U2.19 U2.21 U2.27 U2.30 U2.31 U2.33 U2.36 U2.37 U2.45 U2.63 U2.66 U2.67 U2.69 U2.70 U2.71 U2.72 U2.73 U2.74 U2.75 U2.76 U2.77 U3.12 U3.18 U3.31 U3.47 U3.63 U4.2 U5.1 U5.10 U5.12 U6.2 U6.3 U6.5 U7.1 U7.2 U8.2 U8.3 U8.5 U9.1 U9.2 U10.3 U11.1 U12.3 U13.6 U13.8 U14.1 U14.2 U14.3 U14.6 U14.7 U15.3 U15.5 U15.8 U15.9 U16.10 U17.4 U18.A2 U18.C2 U19.4
CS: U3.49 U16.7
DM: T2.1 U1.28 U2.26
DP: T3.1 U1.27 U2.25
DTR: Q7.3 R32.1 U1.3 U2.6 U3.21
GPS_RXD: Q19.3 Q21.3 R43.1 R47.1 U2.62 U3.17 U5.2
GPS_TXD: Q19.2 Q21.2 U2.61 U3.16 U5.3
LNA_EN: U5.13 U9.5
MDTR: Q7.2 U3.45
MISO: U3.56 U16.8
MOSI: U3.57 U16.15
MRI: Q6.3 R30.1 U3.44
NBIOT_NRXD: Q18.3 R42.1 U3.43
NBIOT_NTXD: Q20.2 U3.42
NET: J1.1 U1.60 U2.32
NET_LIGHT: LED1.1 LED3.1 U1.52 U2.41
NetBATT_2: BATT.2 R7.2 U3.1
NetC2_2: C2.2 R18.2
NetC3_1: C3.1 R2.2 R5.1 U3.8
NetC4_2: C4.2 R1.1 U3.5 Y2.1
NetC5_1: C5.1 U3.4 Y1.2
NetC6_2: C6.2 R1.2 U3.6 Y2.3
NetC7_1: C7.1 U3.3 Y1.1
NetC8_2: C8.2 R6.2 U3.7
NetC10_1: C10.1 J5.1 R17.2
NetC20_2: C20.2 U7.6
NetC21_1: C21.1 R17.1 U6.4
NetC22_1: C22.1 U8.4
NetC22_2: C22.2 U9.6
NetC26_1: C26.1 L3.2 R8.1
NetC27_1: C27.1 D2.2 Q3.3 U10.1
NetC30_1: C30.1 J2.1 R8.2
NetC40_1: C40.1 U13.5
NetD1_2: D1.2 R7.1
NetL1_1: L1.1 U7.3
NetL1_2: L1.2 U6.1
NetL2_1: L2.1 U5.14
NetL3_1: L3.1 U9.3
NetL4_1: L4.1 U17.5
NetL5_2: L5.2 U18.B1
NetL6_1: L6.1 U19.5
NetLED1_2: LED1.2 R9.1
NetLED2_1: LED2.1 R29.2
NetLED2_2: LED2.2 U10.6 U10.7
NetLED3_2: LED3.2 R38.1
NetLED4_1: LED4.1 R12.2
NetLED4_2: LED4.2 U10.8
NetLED5_1: LED5.1 R65.1
NetLED5_2: LED5.2 U3.62
NetQ2_1: Q2.1 R10.1 R11.1
NetQ4_1: Q4.1 R4.1 R16.1
NetQ6_1: Q6.1 R28.1
NetQ7_1: Q7.1 R31.1
NetQ8_1: Q8.1 Q9.3 R33.2
NetQ9_1: Q9.1 R34.1
NetQ10_1: Q10.1 Q11.3 R36.2
NetQ11_1: Q11.1 R37.1
NetQ12_1: Q12.1 Q13.3 R50.2
NetQ13_1: Q13.1 R51.1
NetQ18_1: Q18.1 R40.1
NetQ19_1: Q19.1 R41.1
NetQ20_1: Q20.1 R44.1
NetQ21_1: Q21.1 R45.1
NetR3_1: R3.1 U3.60
NetR13_1: R13.1 U10.2
NetR14_1: R14.1 R15.2 U10.5
NetR14_2: R14.2 U10.4
NetR18_1: R18.1 U5.5
NetR19_2: R19.2 R20.2 U19.1
NetR21_2: R21.2 R48.2 U17.1
NetR23_2: R23.2 U4.5 U11.7
NetR25_1: R25.1 U11.3
NetR25_2: R25.2 R26.2 R27.2 U4.3
NetR26_1: R26.1 U11.2
NetR35_2: R35.2 R49.2 U17.2
NetR39_2: R39.2 U4.6 U11.6
POWER_CTRL: R52.2 U3.23 U19.2
POWER_CTRL1: R37.2 U3.34
POWER_CTRL2: R51.2 U3.35
POWER_CTRL_GPS: R34.2 U3.61
PWRKEY: Q2.3 U1.1 U2.39 U7.5
RESET: Q4.3 U1.16
RF_IN: C20.1 U2.68 U5.11 U8.1
RI: Q6.2 U1.4 U2.7 U3.22
RXD3: U3.25
SCL: R22.2 U3.58 U13.1 U14.13 U15.2
SCLK: U3.55 U16.16
SDA: R24.1 U3.59 U13.4 U14.14 U15.4
SIM_CLK: C17.2 R39.1 U1.32 U2.16
SIM_DATA: C18.2 R27.1 U1.31 U2.15
SIM_PWR: R10.2 U3.15
SIM_RST: C16.2 R16.2 R23.1 U1.33 U2.17 U3.20
SIM_RXD: Q20.3 R46.1 U1.10 U2.2
SIM_TXD: Q18.2 U1.9 U2.1
SIM_VDD: C14.2 U1.30 U2.18 U4.4 U11.8
SPI_RESET: U3.28 U16.3
TXD3: U3.24
VBAT: C44.1 C45.1 C49.1 L4.2 L5.1 L6.2 R2.1 R12.1 R29.1 R49.1 U10.10 U17.3 U18.A1 U19.3
VBAT_OUT: C24.2 C29.1 C31.1 C43.2 C47.1 C48.1 D3.2 R19.1 U1.55 U1.56 U1.57 U2.34 U2.35 U19.6
VBUS: T1.1 U1.24 U2.24
VCC_3.3V_S: C11.2 C12.2 C13.2 C15.2 C28.1 C32.2 C34.1 C35.2 C36.2 C37.1 C38.2 C39.2 C41.2 C42.2 C50.2 D1.1 Q8.2 Q8.3 R6.1 R21.1 R22.1 R24.2 R30.2 R33.1 R42.2 R43.2 R65.2 U3.19 U3.32 U3.48 U3.64 U5.8 U12.1 U13.3 U13.9 U13.10 U14.5 U14.8 U14.12 U15.1 U15.6 U15.10 U16.2 U17.6 U18.C1
VCC_5V: C46.1 Q10.2 Q12.2 R36.1 R50.1 U18.B2
VCC_5V1: P2.2 Q10.3
VCC_5V2: P3.2 Q12.3
VCC_IN: P1.2 Q3.2
VCC_RF: C23.2 C25.2 L2.2 U9.4
VDD_EXT: C19.2 C33.2 R28.2 R31.2 R32.2 R40.2 R41.2 R44.2 R45.2 R46.2 R47.2 U1.15 U2.40 U7.4
WP: U3.27 U16.9
pads on no net: U1.5 U1.6 U1.7 U1.8 U1.11 U1.12 U1.13 U1.14 U1.19 U1.20 U1.21 U1.22 U1.23 U1.25 U1.26 U1.34 U1.35 U1.36 U1.37 U1.38 U1.40 U1.41 U1.42 U1.43 U1.44 U1.47 U1.48 U1.49 U1.50 U1.51 U1.53 U1.66 U1.67 U1.68 U2.3 U2.4 U2.5 U2.9 U2.10 U2.11 U2.12 U2.14 U2.20 U2.22 U2.23 U2.28 U2.29 U2.38 U2.42 U2.43 U2.44 U2.46 U2.47 U2.48 U2.49 U2.50 U2.51 U2.52 U2.53 U2.54 U2.55 U2.56 U2.57 U2.58 U2.59 U2.60 U2.64 U2.65 U3.2 U3.9 U3.10 U3.11 U3.14 U3.26 U3.29 U3.30 U3.33 U3.36 U3.37 U3.38 U3.39 U3.40 U3.41 U3.46 U3.50 U3.51 U3.52 U3.53 U3.54 U4.1 U5.4 U5.6 U5.7 U5.9 U5.15 U5.16 U5.17 U5.18 U10.9 U10.11 U11.4 U11.5 U11.9 U13.2 U13.7 U13.11 U13.12 U14.4 U14.9 U14.10 U14.11 U15.7 U16.1 U16.4 U16.5 U16.6 U16.11 U16.12 U16.13 U16.14 Y1.3 Y2.2 Y2.4
copper on no net:
  other v1: 1020,-2140 1240,-1360

## Silkscreen, mask and mechanical layers (free items; w line width, h text height)
Mechanical 1:
  lines w5: 0,-2362.2 2362.2,-2362.2 2362.2,0 0,0 0,-2362.2

## Text inside footprints (layer, text, board x,y; h text height)
BATT: Top Overlay "+" at 9155,-1520 h40